# Altium PCB NumatoShield.PcbDoc (part 4 of 4)
Units mil, origin at the board's own origin, x right, y up, seen from the top; angles counter-clockwise.
Board outline 5000 x 5000 mil, 4 copper layers (Top Layer, Mid-Layer 1, Mid-Layer 2, Bottom Layer); 8 components, 163 nets, 352 pads, 43 vias.
Unrouted connection lines stored in the file: 11.
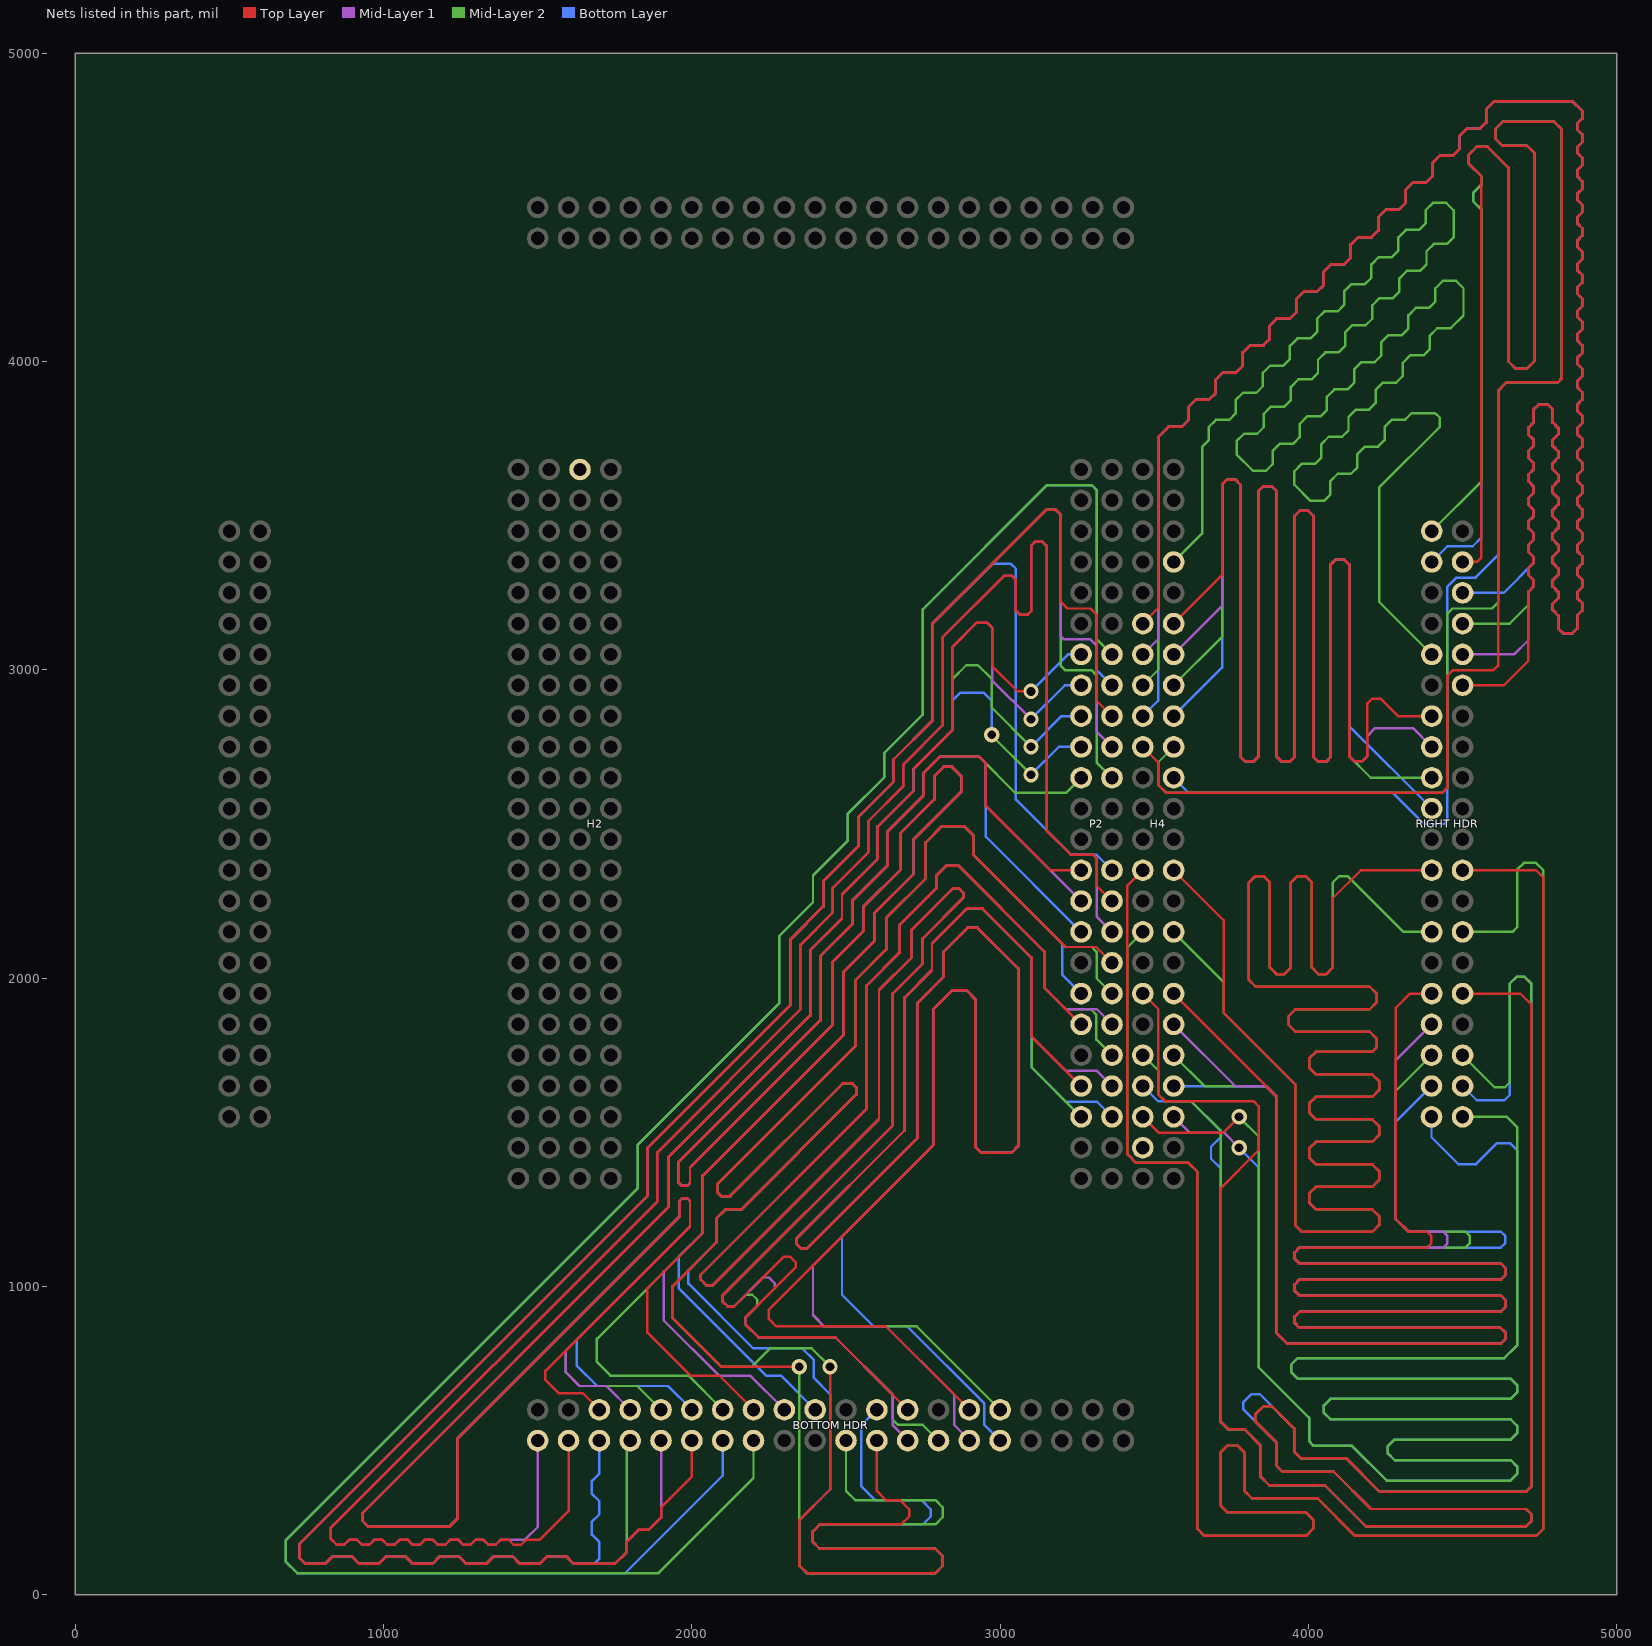
[diagram p6: the nets of this part, all layers, seen from the top]

## Via types
v1: diameter 50, hole 28, Top Layer to Bottom Layer, 43 vias

## Nets (pads, with @x,y where several pads share a name; then routed paths per layer and width w, separated by ;. In a path a pad name is that pad's centre, name@x,y a point inside that pad or via, vN(x,y) a via of type N, cw(c..) or ccw(c..) an arc to the next point about the centre after c; other vN are vias at no path point) (continued)
N10: "BOTTOM HDR.32" P2.22 | length 6904.8
  Top Layer w8: 2200,600 2089,711 1995,711 1856,850 1856,994 2036,1174 2036,1360 2493,1817 2493,2021 2593,2121 2593,2211 2719,2337 2719,2450 2875,2606 2875,2654 2844,2685 2817,2685 2786,2654 2786,2579 2676,2469 2676,2351 2557,2232 2557,2153 2456,2052 2456,1848 1994,1386 1994,1335 1985,1326 1968,1326 1957,1337 1957,1403 2416,1862 2416,2071 2521,2176 2521,2252 2636,2367 2636,2477 2752,2593 2752,2666 2805,2719 2931,2719 2954,2696 2954,2559 3163,2350 P2.22@3262.8,2350
N11: "RIGHT HDR.1" H4.27 | length 6948
  Bottom Layer w8: H4.27@3562.8,2650 3611.8,2601 4274,2601 4375,2500 4440,2500 4451,2511 4451,3270.3 4479.7,3299 4542,3299 4615,3372 4615,3905 4643,3933 4809,3933 4821,3945 4821,4754 4797,4778 4630,4778 4606,4754 4606,4724 4630,4700 4709,4700 4733,4676 4733,4001 4709,3977 4672,3977 4648,4001 4648,4630 4581,4697 4546,4697 4519,4670 4519,4643 4561,4601 4561,4574 4534,4547 4534,4520 4561,4493 4561,3429 4533,3401 4451,3401 4400,3350
N14: "RIGHT HDR.4" H4.41 | length 6906.1
  Mid-Layer 2 w8: H4.41@3562.8,3350 3655,3442.2 3655,3723 3676,3744 3676,3787 3700,3811 3743,3811 3764,3832 3764,3875 3788,3899 3831,3899 3852,3920 3852,3963 3876,3987 3919,3987 3940,4008 3940,4051 3964,4075 4007,4075 4028,4096 4028,4139 4052,4163 4095,4163 4116,4184 4116,4227 4140,4251 4183,4251 4204,4272 4204,4315 4228,4339 4271,4339 4292,4360 4292,4403 4316,4427 4359,4427 4380,4448 4380,4491 4404,4515 4447,4515 4471,4491 4471,4403 4450,4382 4407,4382 4383,4358 4383,4315 4362,4294 4319,4294 4295,4270 4295,4227 4274,4206 4231,4206 4207,4182 4207,4139 4186,4118 4143,4118 4119,4094 4119,4051 4098,4030 4055,4030 4031,4006 4031,3963 4010,3942 3967,3942 3943,3918 3943,3875 3922,3854 3879,3854 3855,3830 3855,3787 3834,3766 3791,3766 3767,3742 3767,3699 3820,3646 3863,3646 3884,3667 3884,3710 3908,3734 3951,3734 3972,3755 3972,3798 3996,3822 4039,3822 4060,3843 4060,3886 4084,3910 4127,3910 4148,3931 4148,3974 4172,3998 4215,3998 4236,4019 4236,4062 4260,4086 4303,4086 4324,4107 4324,4150 4348,4174 4391,4174 4412,4195 4412,4238 4436,4262 4479,4262 4503,4238 4503,4150 4461,4108 4418,4108 4394,4084 4394,4041 4373,4020 4330,4020 4306,3996 4306,3953 4285,3932 4242,3932 4218,3908 4218,3865 4197,3844 4154,3844 4130,3820 4130,3777 4109,3756 4066,3756 4042,3732 4042,3689 4021,3668 3978,3668 3954,3644 3954,3601 4007,3548 4050,3548 4071,3569 4071,3612 4095,3636 4138,3636 4159,3657 4159,3700 4183,3724 4226,3724 4247,3745 4247,3788 4271,3812 4314,3812 4335,3833 4411,3833 4426,3818 4426,3788 4229,3591 4229,3221 4400,3050
N15: "RIGHT HDR.34" H4.38 | length 6896.2
  Top Layer w8: H4.38@3462.8,3150 3513,3200.2 3513,3755 3546,3788 3589,3788 3610,3809 3610,3852 3634,3876 3677,3876 3698,3897 3698,3940 3722,3964 3765,3964 3786,3985 3786,4028 3810,4052 3853,4052 3874,4073 3874,4116 3898,4140 3941,4140 3962,4161 3962,4204 3986,4228 4029,4228 4050,4249 4050,4292 4074,4316 4117,4316 4138,4337 4138,4380 4162,4404 4205,4404 4226,4425 4226,4468 4250,4492 4293,4492 4314,4513 4314,4556 4338,4580 4381,4580 4402,4601 4402,4644 4426,4668 4469,4668 4490,4689 4490,4732 4514,4756 4557,4756 4578,4777 4578,4820 4602,4844 4857,4844 4890,4811 4890,4790 4873,4773 4873,4752 4890,4735 4890,4714 4873,4697 4873,4676 4890,4659 4890,4638 4873,4621 4873,4600 4890,4583 4890,4562 4873,4545 4873,4524 4890,4507 4890,4486 4873,4469 4873,4448 4890,4431 4890,4410 4873,4393 4873,4372 4890,4355 4890,4334 4873,4317 4873,4296 4890,4279 4890,4258 4873,4241 4873,4220 4890,4203 4890,4182 4873,4165 4873,4144 4890,4127 4890,4106 4873,4089 4873,4068 4890,4051 4890,4030 4873,4013 4873,3992 4890,3975 4890,3954 4873,3937 4873,3916 4890,3899 4890,3878 4873,3861 4873,3840 4890,3823 4890,3802 4873,3785 4873,3764 4890,3747 4890,3726 4873,3709 4873,3688 4890,3671 4890,3650 4873,3633 4873,3612 4890,3595 4890,3574 4873,3557 4873,3536 4890,3519 4890,3498 4873,3481 4873,3460 4890,3443 4890,3422 4873,3405 4873,3384 4890,3367 4890,3346 4873,3329 4873,3308 4890,3291 4890,3270 4873,3253 4873,3232 4890,3215 4890,3194 4873,3177 4873,3135 4857,3119 4826,3119 4810,3135 4810,3177 4793,3194 4793,3215 4810,3232 4810,3253 4793,3270 4793,3291 4810,3308 4810,3329 4793,3346 4793,3367 4810,3384 4810,3405 4793,3422 4793,3443 4810,3460 4810,3481 4793,3498 4793,3519 4810,3536 4810,3557 4793,3574 4793,3595 4810,3612 4810,3633 4793,3650 4793,3671 4810,3688 4810,3709 4793,3726 4793,3747 4810,3764 4810,3785 4793,3802 4793,3844 4777,3860 4746,3860 4730,3844 4730,3802 4713,3785 4713,3764 4730,3747 4730,3726 4713,3709 4713,3688 4730,3671 4730,3650 4713,3633 4713,3612 4730,3595 4730,3574 4713,3557 4713,3536 4730,3519 4730,3498 4713,3481 4713,3460 4730,3443 4730,3422 4713,3405 4713,3384 4730,3367 4730,3346 4713,3329 4713,3308 4730,3291 4730,3270 4713,3253 4713,3029 4634,2950 4500,2950
N16: "RIGHT HDR.6" H4.37 | length 6915
  Top Layer w8: H4.37@3562.8,3150 3720,3307.2 3720,3601 3736,3617 3763,3617 3779,3601 3779,2719 3795,2703 3822,2703 3838,2719 3838,3580 3854,3596 3881,3596 3897,3580 3897,2719 3913,2703 3940,2703 3956,2719 3956,3500 3972,3516 3999,3516 4015,3500 4015,2719 4031,2703 4058,2703 4073,2718 4073,3342 4089,3358 4116,3358 4132,3342 4132,2720 4148,2704 4175,2704 4191,2720 4191,2891 4207,2907 4234,2907 4291,2850 4400,2850
P6: "BOTTOM HDR.13" P2.9 | length 6993.4
  Mid-Layer 2 w8: 2800,500 2749,551 2669,551 2651,569 2651,649 2465,835 2216,835 2174,877 2174,899 2212,937 2212,957 2196,973 2175,973 2136,934 2117,934 2098,953 2098,969 2650,1521 2650,1949 2749,2048 2749,2129 2880,2260 2880,2277 2865,2292 2848,2292 2712,2156 2712,2066 2607,1961 2607,1543 2067,1003 2048,1003 2029,1022 2029,1038 2568,1577 2568,1977 2674,2083 2674,2173 2794,2293 2794,2333 2825,2364 2866,2364 3143,2087 3143,1969.8 3213.8,1899 3294,1899 3312,1881 3312,1800.8 P2.9@3362.8,1750
P7: "RIGHT HDR.16" H4.11 | length 6970.1
  Mid-Layer 1 w8: H4.11@3562.8,1850 3762.8,1650 3863,1650 3897,1616 3897,849 3932,814 4624,814 4639,829 4639,850 4623,866 3971,866 3956,881 3956,903 3971,918 4624,918 4639,933 4639,955 4624,970 3971,970 3956,985 3956,1007 3971,1022 4624,1022 4639,1037 4639,1059 4624,1074 3971,1074 3956,1089 3956,1111 3971,1126 4438,1126 4451,1139 4451,1164 4437,1178 4324,1178 4284,1218 4284,1734.83 4399.17,1850
P8: "BOTTOM HDR.10" P2.15 | length 6985.9
  Top Layer w8: v1(2348,740) 2095,740 1937,898 1937,1000 2079,1142 2079,1220 2109,1250 2161,1250 2533,1622 2533,1646 2520,1659 2490,1659 2124,1293 2095,1293 2082,1306 2082,1331 2531,1780 2531,1993 2632,2094 2632,2197 2757,2322 2757,2439 2811,2493 2883,2493 2913,2463 2913,2399.8 3211.8,2101 3311.8,2101 P2.15@3362.8,2050
  Mid-Layer 2 w8: v1(2348,740) 2349,739 2349,94 2373,70 2790,70 2814,94 2814,125 2790,149 2415,149 2391,173 2391,204 2415,228 2790,228 2814,252 2814,283 2790,307 2530,307 2500,337 2500,500
P11: "BOTTOM HDR.2" P2.21 | length 6902.5
  Bottom Layer w8: 1700,500 1700,393 1676,369 1676,327 1700,303 1700,261 1676,237 1676,195 1700,171 1700,118 1682,100 1617,100 1593,124 1530,124 1506,100 1443,100 1419,124 1356,124 1332,100 1269,100 1245,124 1182,124 1158,100 1095,100 1071,124 1008,124 984,100 921,100 897,124 834,124 810,100 747,100 728,119 728,166 1856,1294 1856,1449 2321,1914 2321,2127 2426,2232 2426,2314 2539,2427 2539,2522 2655,2638 2655,2710 2781,2836 2781,3150 2975,3344 3035,3344 3051,3328 3051,2579 3229,2401 3311.8,2401 P2.21@3362.8,2350
P15: "RIGHT HDR.35" H4.36 | length 6915.5
  Mid-Layer 1 w8: H4.36@3462.8,3050 3513,3100.2 3513,3755 3546,3788 3589,3788 3610,3809 3610,3852 3634,3876 3677,3876 3698,3897 3698,3940 3722,3964 3765,3964 3786,3985 3786,4028 3810,4052 3853,4052 3874,4073 3874,4116 3898,4140 3941,4140 3962,4161 3962,4204 3986,4228 4029,4228 4050,4249 4050,4292 4074,4316 4117,4316 4138,4337 4138,4380 4162,4404 4205,4404 4226,4425 4226,4468 4250,4492 4293,4492 4314,4513 4314,4556 4338,4580 4381,4580 4402,4601 4402,4644 4426,4668 4469,4668 4490,4689 4490,4732 4514,4756 4557,4756 4578,4777 4578,4820 4602,4844 4857,4844 4890,4811 4890,4790 4873,4773 4873,4752 4890,4735 4890,4714 4873,4697 4873,4676 4890,4659 4890,4638 4873,4621 4873,4600 4890,4583 4890,4562 4873,4545 4873,4524 4890,4507 4890,4486 4873,4469 4873,4448 4890,4431 4890,4410 4873,4393 4873,4372 4890,4355 4890,4334 4873,4317 4873,4296 4890,4279 4890,4258 4873,4241 4873,4220 4890,4203 4890,4182 4873,4165 4873,4144 4890,4127 4890,4106 4873,4089 4873,4068 4890,4051 4890,4030 4873,4013 4873,3992 4890,3975 4890,3954 4873,3937 4873,3916 4890,3899 4890,3878 4873,3861 4873,3840 4890,3823 4890,3802 4873,3785 4873,3764 4890,3747 4890,3726 4873,3709 4873,3688 4890,3671 4890,3650 4873,3633 4873,3612 4890,3595 4890,3574 4873,3557 4873,3536 4890,3519 4890,3498 4873,3481 4873,3460 4890,3443 4890,3422 4873,3405 4873,3384 4890,3367 4890,3346 4873,3329 4873,3308 4890,3291 4890,3270 4873,3253 4873,3232 4890,3215 4890,3194 4873,3177 4873,3135 4857,3119 4826,3119 4810,3135 4810,3177 4793,3194 4793,3215 4810,3232 4810,3253 4793,3270 4793,3291 4810,3308 4810,3329 4793,3346 4793,3367 4810,3384 4810,3405 4793,3422 4793,3443 4810,3460 4810,3481 4793,3498 4793,3519 4810,3536 4810,3557 4793,3574 4793,3595 4810,3612 4810,3633 4793,3650 4793,3671 4810,3688 4810,3709 4793,3726 4793,3747 4810,3764 4810,3785 4793,3802 4793,3844 4777,3860 4746,3860 4730,3844 4730,3802 4713,3785 4713,3764 4730,3747 4730,3726 4713,3709 4713,3688 4730,3671 4730,3650 4713,3633 4713,3612 4730,3595 4730,3574 4713,3557 4713,3536 4730,3519 4730,3498 4713,3481 4713,3460 4730,3443 4730,3422 4713,3405 4713,3384 4730,3367 4730,3346 4713,3329 4713,3308 4730,3291 4730,3270 4713,3253 4713,3096 4667,3050 4500,3050
P16: "RIGHT HDR.7" H4.35 | length 6915.4
  Mid-Layer 1 w8: H4.35@3562.8,3050 3720,3207.2 3720,3601 3736,3617 3763,3617 3779,3601 3779,2719 3795,2703 3822,2703 3838,2719 3838,3580 3854,3596 3881,3596 3897,3580 3897,2719 3913,2703 3940,2703 3956,2719 3956,3500 3972,3516 3999,3516 4015,3500 4015,2719 4031,2703 4058,2703 4073,2718 4073,3342 4089,3358 4116,3358 4132,3342 4132,2720 4148,2704 4175,2704 4191,2720 4191,2786 4216,2811 4339,2811 4400,2750
PROGB: H4.4
R3: "BOTTOM HDR.24" P2.6 | length 6962.3
  Mid-Layer 2 w8: 3000,600 2729,871 2429,871 2393,907 2393,1068 2784,1459 2784,1900 2845,1961 2890,1961 2919,1932 2919,1454 2940,1433 3036,1433 3058,1455 3058,2032 2927,2163 2894,2163 2817,2086 2817,2005 2733,1921 2733,1483 2372,1122 2356,1122 2340,1138 2340,1156 2689,1505 2689,1936 2779,2026 2779,2112 2893,2226 2942,2226 3102,2066 3102,1710.8 P2.6@3262.8,1550
R5: "BOTTOM HDR.25" P2.8 | length 6972.1
  Top Layer w8: 2900,600 2629,871 2273,871 2250,894 2250,925 2784,1459 2784,1900 2845,1961 2890,1961 2919,1932 2919,1454 2940,1433 3036,1433 3058,1455 3058,2032 2927,2163 2894,2163 2817,2086 2817,2005 2733,1921 2733,1483 2372,1122 2356,1122 2340,1138 2340,1156 2689,1505 2689,1936 2779,2026 2779,2112 2893,2226 2942,2226 3102,2066 3102,1810.8 P2.8@3262.8,1650
R7: "BOTTOM HDR.27" P2.12 | length 6965.7
  Top Layer w8: 2336,1061 2174,899 2174,877 2216,835 2465,835 2700,600 ; 2337,1062 2337,1078 2318,1097 2299,1097 2136,934 2117,934 2098,953 2098,969 2650,1521 2650,1949 2749,2048 2749,2129 2880,2260 2880,2277 2865,2292 2848,2292 2712,2156 2712,2066 2607,1961 2607,1543 2067,1003 2048,1003 2029,1022 2029,1038 2568,1577 2568,1977 2674,2083 2674,2173 2794,2293 2794,2333 2825,2364 2866,2364 3143,2087 3143,1969.8 P2.12@3262.8,1850
R8: "RIGHT HDR.26" H4.18 | length 6935.3
  Mid-Layer 2 w8: H4.18@3462.8,2150 3413,2100.2 3413,1429 3441,1401 3611,1401 3640,1372 3640,214 3663,191 3992,191 4015,214 4015,244 3992,267 3738,267 3715,290 3715,461 3738,484 3770,484 3793,461 3793,336 3816,313 4029,313 4151,191 4739,191 4762,214 4762,2350 4738,2374 4699,2374 4677,2352 4677,2165 4662,2150 4500,2150
R10: "BOTTOM HDR.31" P2.20 | length 6948
  Mid-Layer 1 w8: 2300,600 2189,711 2088,711 1909,890 1909,1047 2036,1174 2036,1360 2493,1817 2493,2021 2593,2121 2593,2211 2719,2337 2719,2450 2875,2606 2875,2654 2844,2685 2817,2685 2786,2654 2786,2579 2676,2469 2676,2351 2557,2232 2557,2153 2456,2052 2456,1848 1994,1386 1994,1335 1985,1326 1968,1326 1957,1337 1957,1403 2416,1862 2416,2071 2521,2176 2521,2252 2636,2367 2636,2477 2752,2593 2752,2666 2805,2719 2931,2719 2954,2696 2954,2558.8 P2.20@3262.8,2250
R11: "BOTTOM HDR.33" P2.28 | length 6928.5
  Mid-Layer 2 w8: 2100,600 1989,711 1736,711 1692,755 1692,830 2036,1174 2036,1360 2493,1817 2493,2021 2593,2121 2593,2211 2719,2337 2719,2450 2875,2606 2875,2654 2844,2685 2817,2685 2786,2654 2786,2579 2676,2469 2676,2351 2557,2232 2557,2153 2456,2052 2456,1848 1994,1386 1994,1335 1985,1326 1968,1326 1957,1337 1957,1403 2416,1862 2416,2071 2521,2176 2521,2252 2636,2367 2636,2477 2752,2593 2752,2666 2805,2719 2931,2719 3049,2601 3213.8,2601 P2.28@3262.8,2650
T3: "BOTTOM HDR.15" P2.5 | length 6973.1
  Bottom Layer w8: 3000,500 2949,551 2949,620.3 2698.3,871 2589,871 2487,973 2487,1162 2784,1459 2784,1900 2845,1961 2890,1961 2919,1932 2919,1453 2939,1433 3036,1433 3058,1455 3058,2032 2927,2163 2894,2163 2817,2086 2817,2005 2733,1921 2733,1483 2372,1122 2356,1122 2340,1138 2340,1156 2689,1505 2689,1936 2779,2026 2779,2112 2893,2226 2942,2226 3102,2066 3102,1711 3214,1599 3313.8,1599 P2.5@3362.8,1550
T4: "RIGHT HDR.20" H4.6 | length 6958.4
  Top Layer w8: H4.6@3462.8,1550 3513.8,1499 3724,1499 v1(3775,1550) ; v1@3757,1542 v1@3757,1550
  Mid-Layer 2 w8: v1(3775,1550) 3839,1486 3839,737 4002,574 4002,498 4017,483 4141,483 4254,370 4655,370 4677,392 4677,416 4657,436 4280,436 4258,458 4258,482 4279,503 4656,503 4677,524 4677,548 4656,569 4071,569 4050,590 4050,614 4071,635 4656,635 4677,656 4677,680 4656,701 3965,701 3944,722 3944,746 3965,767 ; 3966,767 4635,767 4677,809 4677,1517 4644,1550 4500,1550
T5: "BOTTOM HDR.14" P2.7 | length 6962.3
  Mid-Layer 1 w8: 2900,500 2900,502 2851,551 2851,649 2629,871 2429,871 2393,907 2393,1068 2784,1459 2784,1900 2845,1961 2890,1961 2919,1932 2919,1454 2940,1433 3036,1433 3058,1455 3058,2032 2927,2163 2894,2163 2817,2086 2817,2005 2733,1921 2733,1483 2372,1122 2356,1122 2340,1138 2340,1156 2689,1505 2689,1936 2779,2026 2779,2112 2893,2226 2942,2226 3102,2066 3102,1810.8 3213.8,1699 3313.8,1699 P2.7@3362.8,1650
T6: "RIGHT HDR.22" H4.10 | length 6980.8
  Mid-Layer 2 w8: H4.10@3462.8,1750 3513,1699.8 3513,1623 3536,1600 3620,1600 3716,1504 3716,560 3739,537 3792,537 3845,484 3845,383 3873,355 4053,355 4186,222 4706,222 4723,239 4723,261 4706,278 4203,278 4082,399 3916,399 3895,420 3895,495 3827,563 3827,584 3855,612 3881,612 3955,538 3955,463 3976,442 4123,442 4231,334 4706,334 4723,351 4723,1982 4700,2005 4676,2005 4653,1982 ; 4500,1750 4604,1646 4637,1646 4653,1662 4653,1981
T7: "BOTTOM HDR.12" P2.11 | length 6974.7
  Mid-Layer 1 w8: 2700,500 2700,502 2651,551 2651,649 2465,835 2216,835 2174,877 2174,899 2269,994 2269,1010 2250,1029 2231,1029 2136,934 2117,934 2098,953 2098,969 2650,1521 2650,1949 2749,2048 2749,2129 2880,2260 2880,2277 2865,2292 2848,2292 2712,2156 2712,2066 2607,1961 2607,1543 2067,1003 2048,1003 2029,1022 2029,1038 2568,1577 2568,1977 2674,2083 2674,2173 2794,2293 2794,2333 2825,2364 2866,2364 3143,2087 3143,1969.8 3213.8,1899 3313.8,1899 P2.11@3362.8,1850
T8: "RIGHT HDR.13" H4.17 | length 6878.9
  Mid-Layer 2 w8: H4.17@3562.8,2150 3725,1987.8 3725,1887.8 3957,1655.8 3957,1199 3979,1177 4207,1177 4229,1199 4229,1228 4207,1250 4024,1250 4002,1272 4002,1301 4024,1323 4207,1323 4229,1345 4229,1374 4207,1396 4024,1396 4002,1418 4002,1447 4024,1469 4207,1469 4229,1491 4229,1520 4207,1542 4024,1542 4002,1564 4002,1593 4024,1615 4207,1615 4229,1637 4229,1666 4207,1688 4024,1688 4002,1710 4002,1739 4024,1761 4207,1761 4221,1775 4221,1804 4199,1826 3958,1826 3936,1848 3936,1877 3958,1899 4199,1899 4221,1921 4221,1950 4199,1972 3829,1972 3807,1994 3807,2310 3828,2331 3854,2331 3875,2310 3875,2034 3896,2013 3922,2013 3943,2034 3943,2310 3964,2331 3990,2331 4011,2310 4011,2034 4032,2013 4058,2013 4079,2034 4079,2310 4100,2331 4127,2331 4308,2150 4400,2150
T9: "BOTTOM HDR.30" P2.18 | length 7018.6
  Bottom Layer w8: 2400,600 2289,711 2241,711 1957,995 1957,1095 2036,1174 2036,1360 2493,1817 2493,2021 2593,2121 2593,2211 2719,2337 2719,2450 2875,2606 2875,2654 2844,2685 2817,2685 2786,2654 2786,2579 2676,2469 2676,2351 2557,2232 2557,2153 2456,2052 2456,1848 1994,1386 1994,1335 1985,1326 1968,1326 1957,1337 1957,1403 2416,1862 2416,2071 2521,2176 2521,2252 2636,2367 2636,2477 2752,2593 2752,2666 2805,2719 2931,2719 2954,2696 2954,2458.8 P2.18@3262.8,2150
T10: "BOTTOM HDR.1" P2.19 | length 6938.5
  Top Layer w8: 1600,500 1600,272 1507,179 1463,179 1446,162 1422,162 1405,179 1381,179 1364,162 1340,162 1323,179 1299,179 1282,162 1258,162 1241,179 1217,179 1200,162 1176,162 1159,179 1135,179 1118,162 1094,162 1077,179 1053,179 1036,162 1012,162 995,179 971,179 954,162 930,162 913,179 889,179 872,162 848,162 828,182 828,216 1888,1276 1888,1435 2352,1899 2352,2108 2457,2213 2457,2293 2572,2408 2572,2509 2686,2623 2686,2693 2814,2821 2814,3106 3013,3305 3038,3305 3051,3292 3051,3192 3064,3179 3089,3179 3101,3191 3101,3403 3113,3415 3138,3415 3151,3402 3151,2479 3229,2401 3301,2401 3313,2389 3313,2299.8 P2.19@3362.8,2250
T11: "BOTTOM HDR.3" P2.27 | length 6979.1
  Mid-Layer 2 w8: 1800,500 1789,489 1789,139 1750,100 1617,100 1593,124 1530,124 1506,100 1443,100 1419,124 1356,124 1332,100 1269,100 1245,124 1182,124 1158,100 1095,100 1071,124 1008,124 984,100 921,100 897,124 834,124 810,100 747,100 728,119 728,166 1856,1294 1856,1449 2321,1914 2321,2127 2426,2232 2426,2314 2539,2427 2539,2522 2655,2638 2655,2710 2781,2836 2781,3150 3151,3520 3179,3520 3197,3502 3197,3012 3210,2999 3296,2999 3313,2982 3313,2699.8 P2.27@3362.8,2650
T12: "BOTTOM HDR.34" P2.30 | length 6911.3
  Mid-Layer 2 w8: v1@2972,2789 2972,2788 v1(3100,2660)
  Bottom Layer w8: 2000,600 1923,677 1693,677 1626,744 1626,827 1994,1195 1994,1277 1985,1286 1969,1286 1960,1277 1960,1227 1240,507 1240,247 1214,221 950,221 931,240 931,264 1923,1256 1923,1418 2385,1880 2385,2092 2487,2194 2487,2271 2603,2387 2603,2492 2719,2608 2719,2679 2845,2805 2845,2900 2871,2926 2946,2926 2973,2899 v1(2973,2789) ; v1(3100,2660) 3190,2750 P2.30@3262.8,2750
T14: "BOTTOM HDR.35" P2.32 | length 6943.9
  Mid-Layer 2 w8: 1900,600 1823,677 1636,677 1591,722 1591,792 1994,1195 1994,1277 1985,1286 1969,1286 1960,1277 1960,1227 1240,507 1240,247 1214,221 950,221 931,240 931,264 1923,1256 1923,1418 2385,1880 2385,2092 2487,2194 2487,2271 2603,2387 2603,2492 2719,2608 2719,2679 2845,2805 2845,2970 2890,3015 2928,3015 2973,2970 2973,2877 v1(3100,2750)
  Bottom Layer w8: v1@3099.72,2750.28 3199.44,2850 P2.32@3262.8,2850
T17: "BOTTOM HDR.37" P2.36 | length 6978.8
  Top Layer w8: 1700,600 1646,654 1568,654 1525,697 1525,726 1994,1195 1994,1277 1985,1286 1969,1286 1960,1277 1960,1227 1240,507 1240,247 1214,221 950,221 931,240 931,264 1923,1256 1923,1418 2385,1880 2385,2092 2487,2194 2487,2271 2603,2387 2603,2492 2719,2608 2719,2679 2845,2805 2845,3074 2924,3153 2958,3153 2974,3137 2974,3013 3057,2930 v1(3100,2930)
  Bottom Layer w8: v1(3100,2930) 3220,3050 P2.36@3262.8,3050
T18: "BOTTOM HDR.7" P2.35 | length 7018.7
  Mid-Layer 2 w8: 2200,500 2200,378 1892,70 720,70 682,108 682,176 1825,1319 1825,1460 2283,1918 2283,2136 2393,2246 2393,2333 2505,2445 2505,2532 2624,2651 2624,2730 2749,2855 2749,3196 3152,3599 3297,3599 3313,3583 3313,3099.8 P2.35@3362.8,3050
U5: "RIGHT HDR.21" H4.8 | length 7048.8
  Bottom Layer w8: H4.8@3462.8,1650 3512.8,1600 3620,1600 3716,1504 3716,1485 3684,1453 3684,1414 3716,1382 3716,560 3739,537 3792,537 3845,484 3845,383 3873,355 4053,355 4186,222 4706,222 4723,239 4723,261 4706,278 4203,278 4082,399 3916,399 3895,420 3895,495 3788,602 3788,624 3815,651 3842,651 3955,538 3955,463 3976,442 4123,442 4231,334 4706,334 4723,351 4723,1981 4700,2004 4675,2004 4653,1982 4653,1621 4636,1604 4546,1604 4500,1650
U7: "BOTTOM HDR.28" P2.14 | length 6950.4
  Bottom Layer w8: 2600,600 2550,550 2550,351 2594,307 2745,307 2775,277 2775,254 2749,228 2415,228 2391,204 2391,173 2415,149 2790,149 2814,125 2814,94 2790,70 2373,70 2349,94 2349,242 2449,342 2449,650 2396,703 2396,761 2358,799 2199,799 1989,1009 1989,1052 2079,1142 2079,1220 2109,1250 2161,1250 2533,1622 2533,1646 2520,1659 2490,1659 2124,1293 2095,1293 2082,1306 2082,1331 2531,1780 2531,1993 2632,2094 2632,2197 2757,2322 2757,2439 2811,2493 2883,2493 2913,2463 2913,2399.8 3201,2111.8 3201,2011.79 P2.14@3262.8,1950
U8: "RIGHT HDR.24" H4.14 | length 6960.8
  Top Layer w8: H4.14@3462.8,1950 3513,1899.8 3513,1623 3536,1600 3823,1600 3839,1584 3839,1442 3716,1319 3716,560 3739,537 3792,537 3845,484 3845,383 3873,355 4053,355 4186,222 4706,222 4723,239 4723,261 4706,278 4203,278 4082,399 3916,399 3895,420 3895,495 3827,563 3827,584 3855,612 3881,612 3955,538 3955,463 3976,442 4123,442 4231,334 4706,334 4723,351 4723,1914 4687,1950 4500,1950
U11: "RIGHT HDR.28" H4.22 | length 6908.9
  Top Layer w8: H4.22@3462.8,2350 3413,2300.2 3413,1429 3441,1401 3611,1401 3640,1372 3640,214 3663,191 3992,191 4015,214 4015,244 3992,267 3738,267 3715,290 3715,461 3738,484 3770,484 3793,461 3793,336 3816,313 4029,313 4151,191 4739,191 4762,214 4762,2326 4738,2350 4500,2350
U13: "RIGHT HDR.38" H4.30 | length 6938.6
  Top Layer w8: H4.30@3462.8,2750 3513,2699.8 3513,2627 3539,2601 4434,2601 4451,2618 4451,2981 4469,2999 4600,2999 4615,3014 4615,3905 4643,3933 4809,3933 4821,3945 4821,4754 4797,4778 4630,4778 4606,4754 4606,4725 ; 4500,3350 4547,3350 4561,3364 4561,4601 4519,4643 4519,4670 4546,4697 4581,4697 4648,4630 4648,4001 4672,3977 4709,3977 4733,4001 4733,4676 4709,4700 4632,4700 ; 4606,4724 4630,4700
U15: "RIGHT HDR.37" H4.32 | length 6882.1
  Bottom Layer w8: H4.32@3462.8,2850 3513,2900.2 3513,3755 3546,3788 3589,3788 3610,3809 3610,3852 3634,3876 3677,3876 3698,3897 3698,3940 3722,3964 3765,3964 3786,3985 3786,4028 3810,4052 3853,4052 3874,4073 3874,4116 3898,4140 3941,4140 3962,4161 3962,4204 3986,4228 4029,4228 4050,4249 4050,4292 4074,4316 4117,4316 4138,4337 4138,4380 4162,4404 4205,4404 4226,4425 4226,4468 4250,4492 4293,4492 4314,4513 4314,4556 4338,4580 4381,4580 4402,4601 4402,4644 4426,4668 4469,4668 4490,4689 4490,4732 4514,4756 4557,4756 4578,4777 4578,4820 4602,4844 4857,4844 4890,4811 4890,4790 4873,4773 4873,4752 4890,4735 4890,4714 4873,4697 4873,4676 4890,4659 4890,4638 4873,4621 4873,4600 4890,4583 4890,4562 4873,4545 4873,4524 4890,4507 4890,4486 4873,4469 4873,4448 4890,4431 4890,4410 4873,4393 4873,4372 4890,4355 4890,4334 4873,4317 4873,4296 4890,4279 4890,4258 4873,4241 4873,4220 4890,4203 4890,4182 4873,4165 4873,4144 4890,4127 4890,4106 4873,4089 4873,4068 4890,4051 4890,4030 4873,4013 4873,3992 4890,3975 4890,3954 4873,3937 4873,3916 4890,3899 4890,3878 4873,3861 4873,3840 4890,3823 4890,3802 4873,3785 4873,3764 4890,3747 4890,3726 4873,3709 4873,3688 4890,3671 4890,3650 4873,3633 4873,3612 4890,3595 4890,3574 4873,3557 4873,3536 4890,3519 4890,3498 4873,3481 4873,3460 4890,3443 4890,3422 4873,3405 4873,3384 4890,3367 4890,3346 4873,3329 4873,3308 4890,3291 4890,3270 4873,3253 4873,3232 4890,3215 4890,3194 4873,3177 4873,3135 4857,3119 4826,3119 4810,3135 4810,3177 4793,3194 4793,3215 4810,3232 4810,3253 4793,3270 4793,3291 4810,3308 4810,3329 4793,3346 4793,3367 4810,3384 4810,3405 4793,3422 4793,3443 4810,3460 4810,3481 4793,3498 4793,3519 4810,3536 4810,3557 4793,3574 4793,3595 4810,3612 4810,3633 4793,3650 4793,3671 4810,3688 4810,3709 4793,3726 4793,3747 4810,3764 4810,3785 4793,3802 4793,3844 4777,3860 4746,3860 4730,3844 4730,3802 4713,3785 4713,3764 4730,3747 4730,3726 4713,3709 4713,3688 4730,3671 4730,3650 4713,3633 4713,3612 4730,3595 4730,3574 4713,3557 4713,3536 4730,3519 4730,3498 4713,3481 4713,3460 4730,3443 4730,3422 4713,3405 4713,3384 4730,3367 4730,3346 4634,3250 4500,3250
U16: "BOTTOM HDR.36" P2.34 | length 7031.5
  Mid-Layer 1 w8: 1800,600 1723,677 1636,677 1591,722 1591,792 1994,1195 1994,1277 1985,1286 1969,1286 1960,1277 1960,1227 1240,507 1240,247 1214,221 950,221 931,240 931,264 1923,1256 1923,1418 2385,1880 2385,2092 2487,2194 2487,2271 2603,2387 2603,2492 2719,2608 2719,2679 2845,2805 2845,3074 2924,3153 2958,3153 2974,3137 2974,2966 v1(3100,2840)
  Bottom Layer w8: v1(3100,2840) 3210,2950 P2.34@3262.8,2950
U17: "RIGHT HDR.36" H4.34 | length 6907.3
  Mid-Layer 2 w8: H4.34@3462.8,2950 3513,3000.2 3513,3755 3546,3788 3589,3788 3610,3809 3610,3852 3634,3876 3677,3876 3698,3897 3698,3940 3722,3964 3765,3964 3786,3985 3786,4028 3810,4052 3853,4052 3874,4073 3874,4116 3898,4140 3941,4140 3962,4161 3962,4204 3986,4228 4029,4228 4050,4249 4050,4292 4074,4316 4117,4316 4138,4337 4138,4380 4162,4404 4205,4404 4226,4425 4226,4468 4250,4492 4293,4492 4314,4513 4314,4556 4338,4580 4381,4580 4402,4601 4402,4644 4426,4668 4469,4668 4490,4689 4490,4732 4514,4756 4557,4756 4578,4777 4578,4820 4602,4844 4857,4844 4890,4811 4890,4790 4873,4773 4873,4752 4890,4735 4890,4714 4873,4697 4873,4676 4890,4659 4890,4638 4873,4621 4873,4600 4890,4583 4890,4562 4873,4545 4873,4524 4890,4507 4890,4486 4873,4469 4873,4448 4890,4431 4890,4410 4873,4393 4873,4372 4890,4355 4890,4334 4873,4317 4873,4296 4890,4279 4890,4258 4873,4241 4873,4220 4890,4203 4890,4182 4873,4165 4873,4144 4890,4127 4890,4106 4873,4089 4873,4068 4890,4051 4890,4030 4873,4013 4873,3992 4890,3975 4890,3954 4873,3937 4873,3916 4890,3899 4890,3878 4873,3861 4873,3840 4890,3823 4890,3802 4873,3785 4873,3764 4890,3747 4890,3726 4873,3709 4873,3688 4890,3671 4890,3650 4873,3633 4873,3612 4890,3595 4890,3574 4873,3557 4873,3536 4890,3519 4890,3498 4873,3481 4873,3460 4890,3443 4890,3422 4873,3405 4873,3384 4890,3367 4890,3346 4873,3329 4873,3308 4890,3291 4890,3270 4873,3253 4873,3232 4890,3215 4890,3194 4873,3177 4873,3135 4857,3119 4826,3119 4810,3135 4810,3177 4793,3194 4793,3215 4810,3232 4810,3253 4793,3270 4793,3291 4810,3308 4810,3329 4793,3346 4793,3367 4810,3384 4810,3405 4793,3422 4793,3443 4810,3460 4810,3481 4793,3498 4793,3519 4810,3536 4810,3557 4793,3574 4793,3595 4810,3612 4810,3633 4793,3650 4793,3671 4810,3688 4810,3709 4793,3726 4793,3747 4810,3764 4810,3785 4793,3802 4793,3844 4777,3860 4746,3860 4730,3844 4730,3802 4713,3785 4713,3764 4730,3747 4730,3726 4713,3709 4713,3688 4730,3671 4730,3650 4713,3633 4713,3612 4730,3595 4730,3574 4713,3557 4713,3536 4730,3519 4730,3498 4713,3481 4713,3460 4730,3443 4730,3422 4713,3405 4713,3384 4730,3367 4730,3346 4713,3329 4713,3308 4730,3291 4730,3270 4713,3253 4713,3210 4653,3150 4500,3150
U18: "RIGHT HDR.8" H4.33 | length 6930.1
  Mid-Layer 2 w8: H4.33@3562.8,2950 3720,3107.2 3720,3601 3736,3617 3763,3617 3779,3601 3779,2719 3795,2703 3822,2703 3838,2719 3838,3580 3854,3596 3881,3596 3897,3580 3897,2719 3913,2703 3940,2703 3956,2719 3956,3500 3972,3516 3999,3516 4015,3500 4015,2719 4031,2703 4058,2703 4073,2718 4073,3343 4088,3358 4116,3358 4132,3342 4132,2720 4202,2650 4400,2650
V4: "RIGHT HDR.19" H4.5 | length 6903.1
  Mid-Layer 1 w8: H4.5@3562.8,1550 3613.8,1499 3726,1499 v1(3775,1450)
  Bottom Layer w8: v1(3775,1450) 3839,1386 3839,737 4002,574 4002,498 4017,483 4141,483 4254,370 4655,370 4677,392 4677,416 4657,436 4280,436 4258,458 4258,482 4279,503 4657,503 4677,523 4677,548 4656,569 4071,569 4050,590 4050,614 4071,635 4656,635 4677,656 4677,680 4656,701 3965,701 3944,722 3944,746 3965,767 4635,767 4677,809 4677,1442 4654,1465 4612,1465 4544,1397 4486,1397 4399.17,1483.83 4399.17,1550
V5: "RIGHT HDR.18" H4.7 | length 7061.5
  Bottom Layer w8: H4.7@3562.8,1650 3863,1650 3897,1616 3897,849 3932,814 4624,814 4639,829 4639,850 4623,866 3971,866 3956,881 3956,903 3971,918 4624,918 4639,933 4639,955 4624,970 3971,970 3956,985 3956,1007 3971,1022 4624,1022 4639,1037 4639,1059 4624,1074 3971,1074 3956,1089 3956,1111 3971,1126 4624,1126 4639,1141 4639,1163 4624,1178 4324,1178 4284,1218 4284,1534.83 4399.17,1650
V6: "RIGHT HDR.17" H4.9 | length 6972.9
  Mid-Layer 2 w8: H4.9@3562.8,1750 3662.8,1650 3863,1650 3897,1616 3897,849 3932,814 4624,814 4639,829 4639,850 4623,866 3971,866 3956,881 3956,903 3971,918 4624,918 4639,933 4639,955 4624,970 3971,970 3956,985 3956,1007 3971,1022 4624,1022 4639,1037 4639,1059 4624,1074 3971,1074 3956,1089 3956,1111 3971,1126 4509,1126 4524,1141 4524,1163 4509,1178 4324,1178 4284,1218 4284,1634.83 4399.17,1750
V7: "BOTTOM HDR.11" P2.13 | length 6945.4
  Top Layer w8: v1(2448,740) 2449,739 2449,342 2349,242 2349,94 2373,70 2790,70 2814,94 2814,125 2790,149 2415,149 2391,173 2391,204 2415,228 2679,228 2705,254 2705,277 2675,307 2629,307 2600,336 2600,500
  Mid-Layer 2 w8: v1(2448,740) 2389,799 2254,799 2195,740 2095,740 1937,898 1937,1000 2079,1142 2079,1220 2109,1250 2161,1250 2533,1622 2533,1646 2520,1659 2490,1659 2124,1293 2095,1293 2082,1306 2082,1331 2531,1780 2531,1993 2632,2094 2632,2197 2757,2322 2757,2439 2811,2493 2883,2493 2913,2463 2913,2399.8 3211.8,2101 3297,2101 3313,2085 3313,1999.8 P2.13@3362.8,1950
V8: "RIGHT HDR.15" H4.13 | length 7047.5
  Top Layer w8: H4.13@3562.8,1950 3897,1615.8 3897,849 3932,814 4624,814 4639,829 4639,850 4623,866 3971,866 3956,881 3956,903 3971,918 4624,918 4639,933 4639,955 4624,970 3971,970 3956,985 3956,1007 3971,1022 4624,1022 4639,1037 4639,1059 4624,1074 3971,1074 3956,1089 3956,1111 3971,1126 4385,1126 4399,1140 4399,1163 4384,1178 4324,1178 4284,1218 4284,1904 4330,1950 4400,1950
V9: "BOTTOM HDR.0" P2.17 | length 6954.9
  Mid-Layer 1 w8: 1500,500 1500,220 1459,179 1381,179 1364,162 1340,162 1323,179 1299,179 1282,162 1258,162 1241,179 1217,179 1200,162 1176,162 1159,179 1135,179 1118,162 1094,162 1077,179 1053,179 1036,162 1012,162 995,179 971,179 954,162 930,162 913,179 889,179 872,162 848,162 828,182 828,216 1888,1276 1888,1435 2352,1899 2352,2108 2457,2213 2457,2293 2572,2408 2572,2509 2686,2623 2686,2693 2814,2821 2814,3106 3013,3305 3038,3305 3051,3292 3051,3192 3064,3179 3089,3179 3101,3191 3101,3403 3113,3415 3138,3415 3151,3402 3151,2479 3229,2401 3301,2401 3313,2389 3313,2199.8 P2.17@3362.8,2150
V11: "RIGHT HDR.11" H4.21 | length 6982
  Top Layer w8: H4.21@3562.8,2350 3725,2187.8 3725,1887.8 3957,1655.8 3957,1199 3979,1177 4207,1177 4229,1199 4229,1228 4207,1250 4024,1250 4002,1272 4002,1301 4024,1323 4207,1323 4229,1345 4229,1374 4207,1396 4024,1396 4002,1418 4002,1447 4024,1469 4207,1469 4229,1491 4229,1520 4207,1542 4024,1542 4002,1564 4002,1593 4024,1615 4207,1615 4229,1637 4229,1666 4207,1688 4024,1688 4002,1710 4002,1739 4024,1761 4207,1761 4221,1775 4221,1804 4199,1826 3958,1826 3936,1848 3936,1877 3958,1899 4199,1899 4221,1921 4221,1950 4199,1972 3829,1972 3807,1994 3807,2310 3828,2331 3854,2331 3875,2310 3875,2034 3896,2013 3922,2013 3943,2034 3943,2310 3964,2331 3990,2331 4011,2310 4011,2034 4032,2013 4058,2013 4079,2034 4079,2259 4170,2350 4400,2350
V12: "BOTTOM HDR.4" P2.29 | length 6939.9
  Mid-Layer 1 w8: 1900,500 1900,250 1861,211 1828,211 1789,172 1789,139 1750,100 1617,100 1593,124 1530,124 1506,100 1443,100 1419,124 1356,124 1332,100 1269,100 1245,124 1182,124 1158,100 1095,100 1071,124 1008,124 984,100 921,100 897,124 834,124 810,100 747,100 728,119 728,166 1856,1294 1856,1449 2321,1914 2321,2127 2426,2232 2426,2314 2539,2427 2539,2522 2655,2638 2655,2710 2781,2836 2781,3150 3151,3520 3179,3520 3197,3502 3197,3109 3207,3099 3293,3099 3313,3079 3313,2799.8 P2.29@3362.8,2750
V13: "RIGHT HDR.0" H4.29 | length 6877.1
  Mid-Layer 2 w8: H4.29@3562.8,2750 3513,2700.2 3513,2627 3539,2601 4434,2601 4451,2618 4451,3183 4467,3199 4596,3199 4615,3218 4615,3905 4643,3933 4809,3933 4821,3945 4821,4754 4797,4778 4630,4778 4606,4754 4606,4724 4630,4700 4709,4700 4733,4676 4733,4001 4709,3977 4672,3977 4648,4001 4648,4630 4581,4697 4546,4697 4519,4670 4519,4643 4561,4601 4561,4573 4560,4573 4534,4547 4534,4520 4561,4493 4561,3611 4400,3450
V14: "BOTTOM HDR.5" P2.31 | length 6874.9
  Top Layer w8: 2000,500 2000,383 1900,283 1900,250 1861,211 1828,211 1789,172 1789,139 1750,100 1617,100 1593,124 1530,124 1506,100 1443,100 1419,124 1356,124 1332,100 1269,100 1245,124 1182,124 1158,100 1095,100 1071,124 1008,124 984,100 921,100 897,124 834,124 810,100 747,100 728,119 728,166 1856,1294 1856,1449 2321,1914 2321,2127 2426,2232 2426,2314 2539,2427 2539,2522 2655,2638 2655,2710 2781,2836 2781,3150 3151,3520 3179,3520 3197,3502 3197,3220 3218,3199 3293,3199 3313,3179 3313,2899.8 P2.31@3362.8,2850
V15: "RIGHT HDR.9" H4.31 | length 7013.5
  Bottom Layer w8: H4.31@3562.8,2850 3720,3007.2 3720,3601 3736,3617 3763,3617 3779,3601 3779,2719 3795,2703 3822,2703 3838,2719 3838,3580 3854,3596 3881,3596 3897,3580 3897,2719 3913,2703 3940,2703 3956,2719 3956,3500 3972,3516 3999,3516 4015,3500 4015,2719 4031,2703 4058,2703 4073,2718 4073,3342 4089,3358 4116,3358 4132,3342 4132,2818 4400,2550
V16: "BOTTOM HDR.6" P2.33 | length 7014
  Bottom Layer w8: 2100,500 2100,386 1784,70 720,70 682,108 682,176 1825,1319 1825,1460 2283,1918 2283,2136 2393,2246 2393,2333 2505,2445 2505,2532 2624,2651 2624,2730 2749,2855 2749,3196 3152,3599 3297,3599 3313,3583 3313,2999.8 P2.33@3362.8,2950
VCCIN: H2.48

## Polygon pours and split planes (outlines as drawn)
GND on Bottom Layer "Bottom Layer-No Net" (solid, remove dead copper, pour order 3): 0,5000 0,0 5000,0 5000,5000

## Silkscreen, mask and mechanical layers (free items; w line width, h text height)
Top Overlay:
  text "AVG TRACE LENGTH: 7 IN" at 3600,4800 h60
  text "TOLERANCE: 200 MIL IN" at 3600,4700 h60
  text "A2" at 2525,4651 h60 r90
  text "A4" at 2625,4651 h60 r90
  text "A9" at 3125,4651 h60 r90
  text "F9" at 3225,4651 h60 r90
  text "A12" at 1525,4650 h60 r90
  text "E12" at 1625,4650 h60 r90
  text "E13" at 1725,4650 h60 r90
  text "C14" at 1825,4650 h60 r90
  text "A16" at 1925,4650 h60 r90
  text "D18" at 2025,4650 h60 r90
  text "F18" at 2126,4650 h60 r90
  text "G18" at 2225,4650 h60 r90
  text "H14" at 2325,4650 h60 r90
  text "K14" at 2425,4650 h60 r90
  text "C6" at 2725,4650 h60 r90
  text "A7" at 2825,4650 h60 r90
  text "A8" at 2925,4650 h60 r90
  text "E8" at 3025,4650 h60 r90
  text "A11" at 3325,4650 h60 r90
  text "C11" at 3425,4650 h60 r90
  text "D11" at 2525,4101 h60 r90
  text "B11" at 2625,4101 h60 r90
  text "C7" at 3125,4101 h60 r90
  text "D6" at 3225,4101 h60 r90
  text "J13" at 1525,4100 h60 r90
  text "H13" at 1625,4100 h60 r90
  text "G16" at 1725,4100 h60 r90
  text "F17" at 1825,4100 h60 r90
  text "D17" at 1925,4100 h60 r90
  text "B16" at 2025,4100 h60 r90
  text "D14" at 2126,4100 h60 r90
  text "F13" at 2225,4100 h60 r90
  text "F12" at 2325,4100 h60 r90
  text "B12" at 2425,4100 h60 r90
  text "G9" at 2725,4100 h60 r90
  text "B9" at 2825,4100 h60 r90
  text "E7" at 2925,4100 h60 r90
  text "B8" at 3025,4100 h60 r90
  text "B4" at 3325,4100 h60 r90
  text "B2" at 3425,4100 h60 r90
  text "THIS SIDE NEAR USB PORT" at 1375,3900 h100
  text "1" at 1262.2,3625 h60
  text "4" at 1812.2,3625 h60
  text "1" at 3137.8,3625 h60
  text "4" at 3650,3625 h60
  text "5" at 1262.2,3525 h60
  text "5" at 3137.8,3525 h60
  text "8" at 1812.2,3524 h60
  text "8" at 3650,3524 h60
  text "D12" at 225,3425 h60
  text "G13" at 775,3425 h60
  text "9" at 1262.2,3425 h60
  text "9" at 3137.8,3425 h60
  text "V13" at 4125,3425 h60
  text "M11" at 4675,3425 h60
  text "12" at 1812.2,3424 h60
  text "12" at 3650,3424 h60
  text "C13" at 225,3325 h60
  text "H16" at 775,3325 h60
  text "13" at 1262.2,3325 h60
  text "16" at 1812.2,3325 h60
  text "13" at 3087.8,3325 h60
  text "16" at 3650,3325 h60
  text "N11" at 4125,3325 h60
  text "U13" at 4675,3325 h60
  text "B14" at 225,3225 h60
  text "G14" at 775,3225 h60
  text "17" at 1262.2,3225 h60
  text "20" at 1812.2,3225 h60
  text "17" at 3087.8,3225 h60
  text "20" at 3650,3225 h60
  text "K13" at 4125,3225 h60
  text "U15" at 4675,3225 h60
  text "C15" at 225,3125 h60
  text "F16" at 775,3125 h60
  text "21" at 1262.2,3125 h60
  text "24" at 1812.2,3125 h60
  text "21" at 3087.8,3125 h60
  text "24" at 3650,3125 h60
  text "M13" at 4125,3125 h60
  text "U17" at 4675,3125 h60
  text "C17" at 225,3025 h60
  text "E18" at 775,3025 h60
  text "N14" at 4125,3025 h60
  text "P15" at 4675,3025 h60
  text "25" at 1262.2,3024 h60
  text "28" at 1812.2,3024 h60
  text "25" at 3087.8,3024 h60
  text "28" at 3650,3024 h60
  text "E16" at 225,2925 h60
  text "C18" at 775,2925 h60
  text "29" at 1262.2,2925 h60
  text "32" at 1812.2,2925 h60
  text "29" at 3087.8,2925 h60
  text "32" at 3650,2925 h60
  text "L16" at 4125,2925 h60
  text "N15" at 4675,2925 h60
  text "33" at 1262.2,2825 h60
  text "36" at 1812.2,2825 h60
  text "33" at 3087.8,2825 h60
  text "36" at 3650,2825 h60
  text "F15" at 225,2824 h60
  text "A15" at 775,2824 h60
  text "N16" at 4125,2824 h60
  text "L15" at 4675,2824 h60
  text "F14" at 225,2725 h60
  text "A14" at 775,2725 h60
  text "37" at 1262.2,2725 h60
  text "40" at 1812.2,2725 h60
  text "37" at 3087.8,2725 h60
  text "40" at 3650,2725 h60
  text "P16" at 4125,2725 h60
  text "M14" at 4675,2725 h60
  text "H15" at 225,2625 h60
  text "A13" at 775,2625 h60
  text "41" at 1262.2,2625 h60
  text "44" at 1812.2,2625 h60
  text "41" at 3087.8,2625 h60
  text "44" at 3651,2625 h60
  text "U18" at 4125,2625 h60
  text "L14" at 4675,2625 h60
  text "H12" at 225,2525 h60
  text "C12" at 775,2525 h60
  text "45" at 1262.2,2525 h60
  text "48" at 1812.2,2525 h60
  text "45" at 3087.8,2525 h60
  text "48" at 3651,2525 h60
  text "V15" at 4125,2525 h60
  text "K12" at 4675,2525 h60
  text "B3" at 226,2425 h60
  text "E11" at 776,2425 h60
  text "49" at 1262.2,2425 h60
  text "52" at 1812.2,2425 h60
  text "49" at 3087.8,2425 h60
  text "52" at 3650,2425 h60
  text "GND" at 4126,2425 h60
  text "GND" at 4676,2425 h60
  text "C5" at 226,2325 h60
  text "F10" at 776,2325 h60
  text "53" at 1262.2,2325 h60
  text "56" at 1812.2,2325 h60
  text "53" at 3087.8,2325 h60
  text "56" at 3650,2325 h60
  text "V11" at 4126,2325 h60
  text "U11" at 4676,2325 h60
  text "B6" at 225,2225 h60
  text "A10" at 775,2225 h60
  text "57" at 1262.2,2225 h60
  text "60" at 1812.2,2225 h60
  text "57" at 3087.8,2225 h60
  text "60" at 3650,2225 h60
  text "N9" at 4125,2225 h60
  text "M10" at 4675,2225 h60
  text "F7" at 225,2125 h60
  text "C9" at 775,2125 h60
  text "61" at 1262.2,2125 h60
  text "64" at 1812.2,2125 h60
  text "61" at 3087.8,2125 h60
  text "64" at 3650,2125 h60
  text "T8" at 4125,2125 h60
  text "R8" at 4675,2125 h60
  text "D8" at 225,2025 h60
  text "F8" at 775,2025 h60
  text "65" at 1262.2,2025 h60
  text "68" at 1812.2,2025 h60
  text "65" at 3087.8,2025 h60
  text "68" at 3651,2025 h60
  text "N8" at 4125,2025 h60
  text "M8" at 4675,2025 h60
  text "G8" at 225,1925 h60
  text "C8" at 775,1925 h60
  text "69" at 1262.2,1925 h60
  text "72" at 1812.2,1925 h60
  text "69" at 3087.8,1925 h60
  text "72" at 3651,1925 h60
  text "V8" at 4125,1925 h60
  text "U8" at 4675,1925 h60
  text "D9" at 226,1825 h60
  text "E6" at 776,1825 h60
  text "73" at 1262.2,1825 h60
  text "76" at 1812.2,1825 h60
  text "73" at 3087.8,1825 h60
  text "76" at 3650,1825 h60
  text "P7" at 4126,1825 h60
  text "N6" at 4676,1825 h60
  text "C10" at 226,1725 h60
  text "A6" at 776,1725 h60
  text "77" at 1262.2,1725 h60
  text "80" at 1812.2,1725 h60
  text "77" at 3087.8,1725 h60
  text "80" at 3650,1725 h60
  text "V6" at 4126,1725 h60
  text "T6" at 4676,1725 h60
  text "G11" at 225,1625 h60
  text "A5" at 775,1625 h60
  text "81" at 1262.2,1625 h60
  text "84" at 1812.2,1625 h60
  text "81" at 3087.8,1625 h60
  text "84" at 3650,1625 h60
  text "V5" at 4125,1625 h60
  text "U5" at 4675,1625 h60
  text "F11" at 225,1525 h60
  text "A3" at 775,1525 h60
  text "85" at 1262.2,1525 h60
  text "88" at 1812.2,1525 h60
  text "85" at 3087.8,1525 h60
  text "88" at 3651,1525 h60
  text "V4" at 4125,1525 h60
  text "T4" at 4675,1525 h60
  text "89" at 1262.2,1425 h60
  text "92" at 1812.2,1425 h60
  text "89" at 3087.8,1425 h60
  text "92" at 3651,1425 h60
  text "93" at 1262.2,1325 h60
  text "96" at 1812.2,1325 h60
  text "93" at 3087.8,1325 h60
  text "96" at 3650,1325 h60
  text "THIS SIDE NEAR JTAG PORT" at 1325,1000 h100
  text "N7" at 2525,751 h60 r90
  text "U7" at 2625,751 h60 r90
  text "GND" at 3125,751 h60 r90
  text "GND" at 3225,751 h60 r90
  text "L12" at 1525,750 h60 r90
  text "K15" at 1625,750 h60 r90
  text "T17" at 1725,750 h60 r90
  text "U16" at 1825,750 h60 r90
  text "T14" at 1925,750 h60 r90
  text "T12" at 2025,750 h60 r90
  text "R11" at 2126,750 h60 r90
  text "N10" at 2225,750 h60 r90
  text "R10" at 2325,750 h60 r90
  text "T9" at 2425,750 h60 r90
  text "R7" at 2725,750 h60 r90
  text "N5" at 2825,750 h60 r90
  text "R5" at 2925,750 h60 r90
  text "R3" at 3025,750 h60 r90
  text "GND" at 3325,750 h60 r90
  text "GND" at 3425,750 h60 r90
  text "NUMATO SHIELD" at 4000,275 h50
  text "P8" at 2525,201 h60 r90
  text "V7" at 2625,201 h60 r90
  text "GND" at 3125,201 h60 r90
  text "GND" at 3225,201 h60 r90
  text "V9" at 1525,200 h60 r90
  text "T10" at 1625,200 h60 r90
  text "P11" at 1725,200 h60 r90
  text "T11" at 1825,200 h60 r90
  text "V12" at 1925,200 h60 r90
  text "V14" at 2025,200 h60 r90
  text "V16" at 2126,200 h60 r90
  text "T18" at 2225,200 h60 r90
  text "K16" at 2325,200 h60 r90
  text "L13" at 2425,200 h60 r90
  text "T7" at 2725,200 h60 r90
  text "P6" at 2825,200 h60 r90
  text "T5" at 2925,200 h60 r90
  text "T3" at 3025,200 h60 r90
  text "GND" at 3325,200 h60 r90
  text "GND" at 3425,200 h60 r90
  text "DANIEL KHOURY" at 4000,200 h50
  text "UNIVERSITY OF UTAH" at 4000,125 h50